# EAGLE board Board v3 (EAGLE 9.7.0)
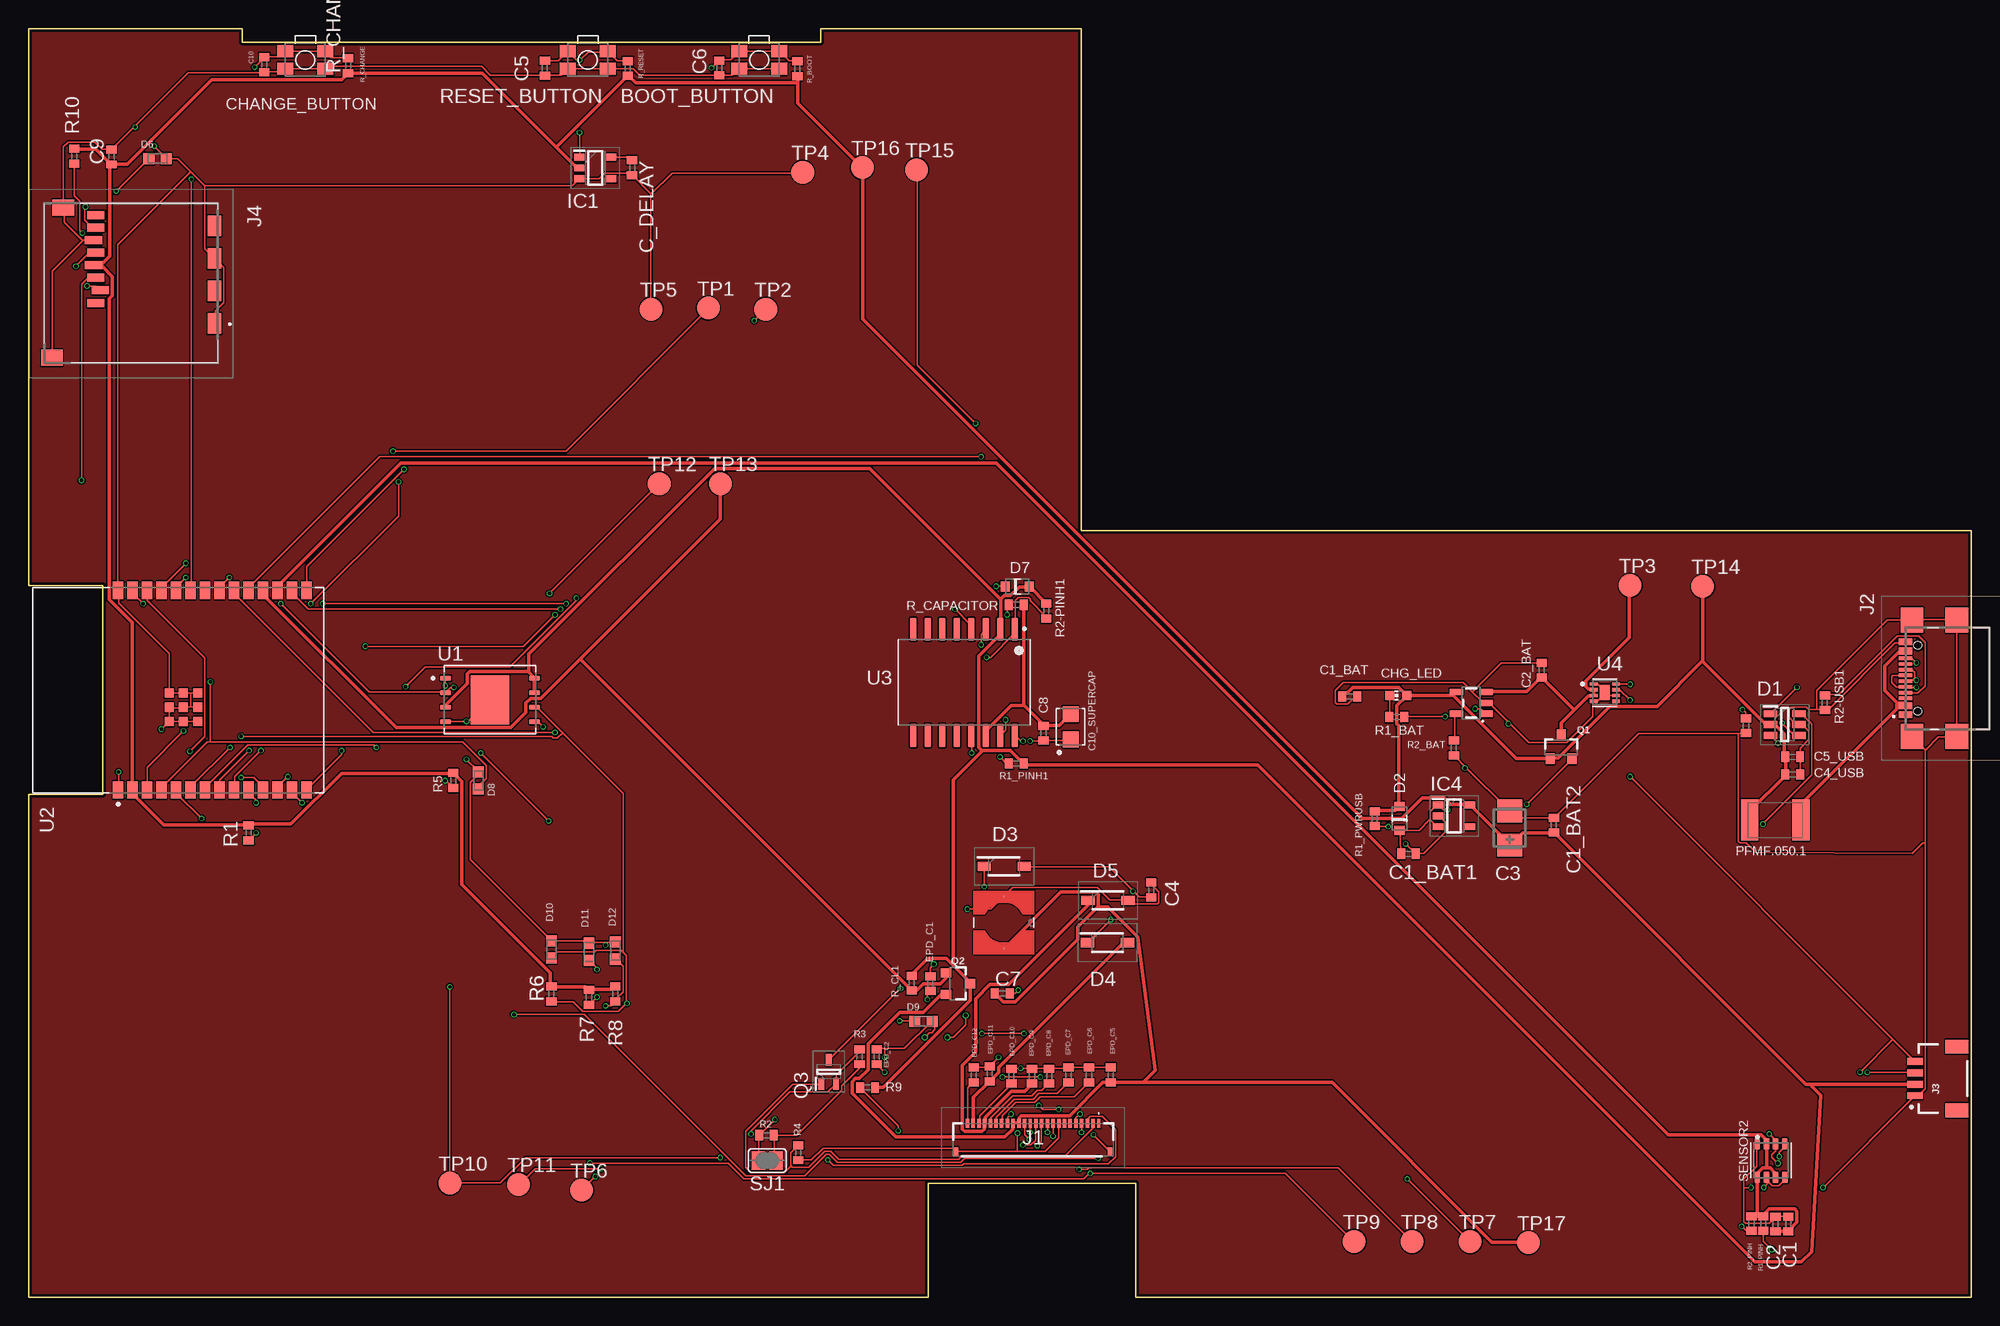
[diagram p0: board, top side]
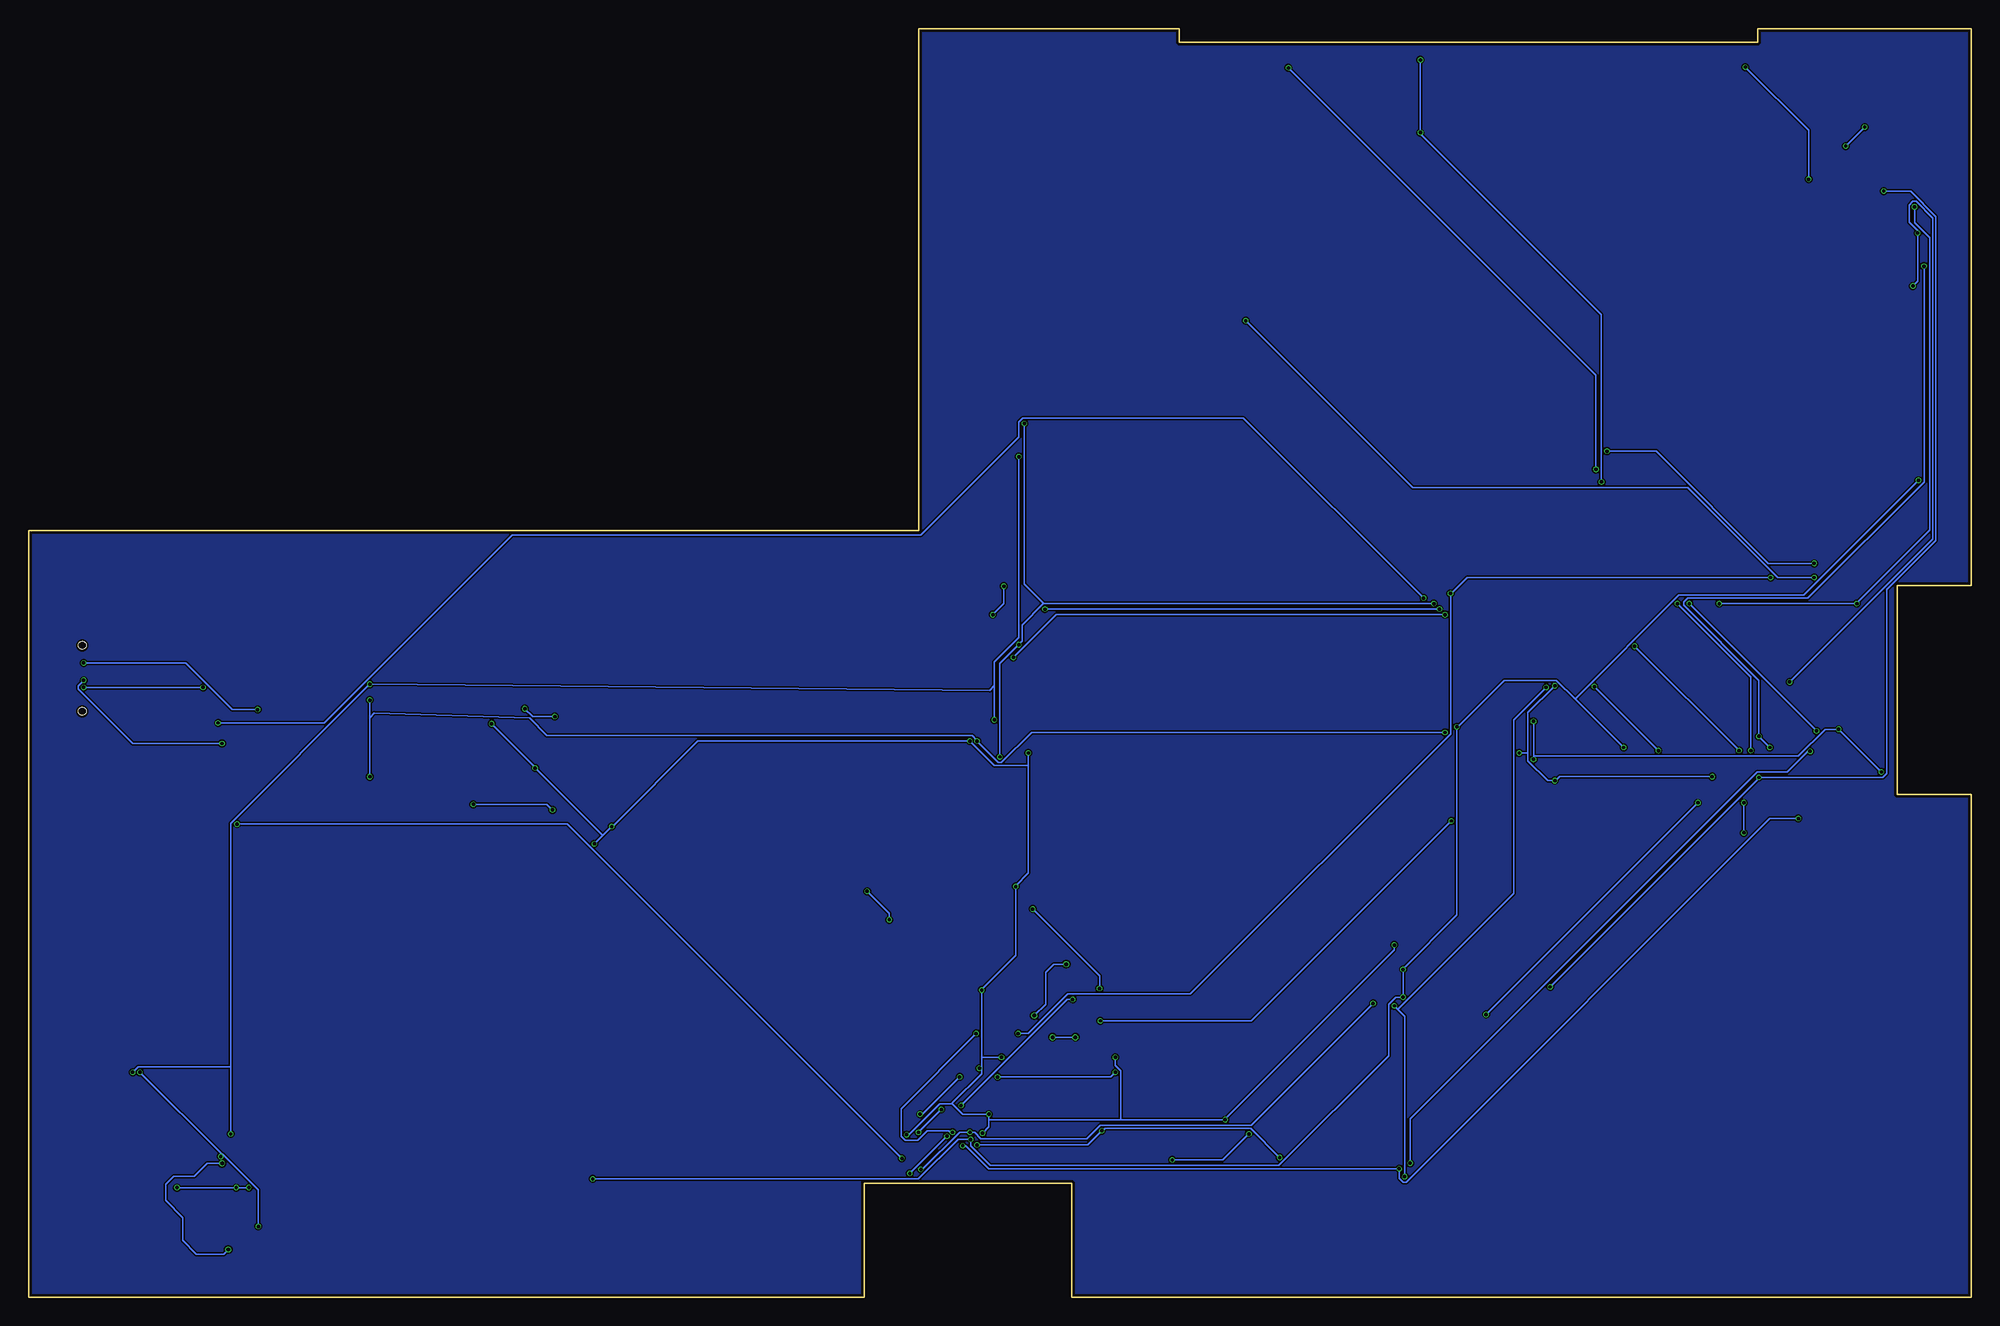
[diagram p1: board, bottom side, seen from below]

Size 170.2 x 111.2 mm. Coordinates in mm from the lower left corner, seen from the top.
Outline: 0,111.2 18.7,111.2 18.7,110 69.4,110 69.4,111.2 92.2,111.2 92.2,67.2 170.2,67.2 170.2,0 97,0 97,10 78.8,10 78.8,0 0,0 0,44.1 6.5,44.1 6.5,62.4 0,62.4 0,111.2
Copper layers (1*16): Top 0.035mm / dielectric 1.6mm / Bottom 0.035mm
Design rules "jlcpcb-2layers": minimum track width 5mil, minimum drill 0.3mm, track to track 5mil, track to pad 5mil, pad to pad 5mil, via to via 5mil, smd to smd 5mil, copper to edge 0.2mm, drill to drill 6mil, minimum pad ring 10mil, minimum via ring 3mil, stop-mask expansion 4mil, vias tented up to drill 0mil, thermal gap 10mil

## Footprints (pad centres in the part's own frame; a part is rotated, then mirrored left to right if it is on the bottom)
MYBUTTON = smd 1.4 x 1.05: 1 1.75,0.75; 2 -1.75,0.75; 3 -1.75,-0.75; 4 1.75,-0.75
EAGLE-LTSPICE_C0402 = smd 0.7 x 0.9: 1 -0.65,0; 2 0.65,0
ESP32_WROVER_EAGLE-LTSPICE_C0402 = smd 0.7 x 0.9: 1 -0.65,0; 2 0.65,0
RCL_CT3528 = smd 2 x 2.2: + -1.5,0; - 1.5,0
CAPCP3225X100N = smd 1.4 x 1.4: 1 -1.1,0; 2 1.1,0
ADAFRUIT_CHIP-LED0603 = smd 0.8 x 0.8: A 0,-0.75; C 0,0.75
SOT95P280X145-6N = smd 1.2 x 0.6: 1 -1.25,0.95; 2 -1.25,0; 3 -1.25,-0.95; 4 1.25,-0.95; 5 1.25,0; 6 1.25,0.95
ESP32_WROVER_AVX---SD0805S020S1R0_AVX_SD0805S020S1R0_0 = smd 0.8 x 0.9: 1 -1.05,0; 2 1.05,0
SOD3716X135N = smd 1.15 x 0.8: 1 -1.75,0; 2 1.75,0
DIOC1608X36N = smd 0.97 x 0.94: 1 -0.75,0; 2 0.75,0
SOT95P280X125-5N = smd 0.9 x 0.6: 1 -1.4,0.95; 2 -1.4,0; 3 -1.4,-0.95; 4 1.4,-0.95; 5 1.4,0.95
SOT95P280X120-5N = smd 0.9 x 0.6: 1 -1.4,0.95; 2 -1.4,0; 3 -1.4,-0.95; 4 1.4,-0.95; 5 1.4,0.95
FH34SRJ24S05SH99 = smd 0.3 x 0.8: 1 5.75,1.45; 2 5.25,1.45; 3 4.75,1.45; 4 4.25,1.45; 5 3.75,1.45; 6 3.25,1.45; 7 2.75,1.45; 8 2.25,1.45; 9 1.75,1.45; 10 1.25,1.45; 11 0.75,1.45; 12 0.25,1.45; 13 -0.25,1.45; 14 -0.75,1.45; 15 -1.25,1.45; 16 -1.75,1.45; 17 -2.25,1.45; 18 -2.75,1.45; 19 -3.25,1.45; 20 -3.75,1.45; 21 -4.25,1.45; 22 -4.75,1.45; 23 -5.25,1.45; 24 -5.75,1.45 | smd 0.4 x 0.8: MP1 6.75,-1.05; MP2 -6.75,-1.05
SAMACSYS_PARTS_USB4110GFA = smd 0.3 x 1.15: A1 -3.35,3.678; A4 -2.55,3.678; A5 -1.25,3.678; A6 -0.25,3.678; A7 0.25,3.678; A8 1.25,3.678; A9 2.55,3.678; A12 3.35,3.678; B1 3.05,3.678; B4 2.25,3.678; B5 1.75,3.678; B6 0.75,3.678; B7 -0.75,3.678; B8 -1.75,3.678; B9 -2.25,3.678; B12 -3.05,3.678 | smd 2.18 x 2: MP1 -5.11,-0.827; MP2 5.11,-0.827; MP3 -5.11,3.103; MP4 5.11,3.103 | hole 0.65: -2.89,2.603; 2.89,2.603
JST04_1MM_RA = smd 0.6 x 1.35: 1 -1.5,0; 2 -0.5,0; 3 0.5,0; 4 1.5,0 | smd 1.2 x 2: NC1 2.8,-3.675; NC2 -2.8,-3.675
112ATAARR03ATTEND = smd 1.8 x 1.2: G1 10.6,10.4; G2 4.9,10.4; S1 7.75,10.4; S2 2.05,10.4 | smd 1.4 x 1.9: G3 13.6,-3.85; G4 0.45,-2.85 | smd 0.7 x 1.5: P1 8.8,0; P2 7.7,0.4; P3 6.6,0; P4 5.5,-0.2; P5 4.4,0; P6 3.3,-0.2; P7 2.2,0; P8 1.1,0
IND_4828-WE-TPC_WRE = smd 0.127 x 0.127: 1 -2.286,0; 2 2.286,0
ESP32_WROVER_SPARKFUN-IC-POWER_SOT23-5 = smd 0.55 x 1.2: 1 -0.95,-1.3; 2 0,-1.3; 3 0.95,-1.3; 4 0.95,1.3; 5 -0.95,1.3
ESP32C6_VARISTOR_CT/CN1812 = smd 1.5 x 3.6: 1 -2.25,0; 2 2.25,0
ESP32_WROVER_SPARKFUN-DISCRETESEMI_SOT23-3 = smd 0.8 x 0.9: 1 -0.95,-1; 2 0.95,-1; 3 0,1.1
SOT65P210X110-3N = smd 1.05 x 0.5: 1 -1.05,0.65; 2 -1.05,-0.65; 3 1.05,0
ESP32_WROVER_EAGLE-LTSPICE_R0402 = smd 0.7 x 0.9: 1 -0.65,0; 2 0.65,0
ESP32_WROVER_BME680_PSON80P300X300X100-8N = smd 1.016 x 0.5: 1 1.458,1.2; 2 1.458,0.4; 3 1.458,-0.4; 4 1.458,-1.2; 5 -1.458,-1.22; 6 -1.458,-0.4; 7 -1.458,0.4; 8 -1.458,1.2
SJ = smd 1.168 x 1.6: 1 -0.762,0; 2 0.762,0
TP20R = smd 2 x 2: TP 0,0
SON127P600X800X80-9N = smd 0.94 x 0.44: 1 -3.895,1.905; 2 -3.895,0.635; 3 -3.895,-0.635; 4 -3.895,-1.905; 5 3.895,-1.905; 6 3.895,-0.635; 7 3.895,0.635; 8 3.895,1.905 | smd 3.4 x 4.3: 9 0,0
XCVR_ESP32-C6-WROOM-1-N8 = smd 1.5 x 0.9: 1 -8.75,5.26; 2 -8.75,3.99; 3 -8.75,2.72; 4 -8.75,1.45; 5 -8.75,0.18; 6 -8.75,-1.09; 7 -8.75,-2.36; 8 -8.75,-3.63; 9 -8.75,-4.9; 10 -8.75,-6.17; 11 -8.75,-7.44; 12 -8.75,-8.71; 13 -8.75,-9.98; 14 -8.75,-11.25; 15 8.75,-11.25; 16 8.75,-9.98; 17 8.75,-8.71; 18 8.75,-7.44; 19 8.75,-6.17; 20 8.75,-4.9; 21 8.75,-3.63; 22 8.75,-2.36; 23 8.75,-1.09; 24 8.75,0.18; 25 8.75,1.45; 26 8.75,2.72; 27 8.75,3.99; 28 8.75,5.26 | smd 0.8 x 0.8: 29_1 -2.755,0.79; 29_2 -1.505,0.79; 29_3 -0.255,0.79; 29_4 -2.755,-0.46; 29_5 -1.505,-0.46; 29_6 -0.255,-0.46; 29_7 -2.755,-1.71; 29_8 -1.505,-1.71; 29_9 -0.255,-1.71
SOIC127P1032X265-16N = smd 2.05 x 0.59: 1 -4.655,4.445; 2 -4.655,3.175; 3 -4.655,1.905; 4 -4.655,0.635; 5 -4.655,-0.635; 6 -4.655,-1.905; 7 -4.655,-3.175; 8 -4.655,-4.445; 9 4.655,-4.445; 10 4.655,-3.175; 11 4.655,-1.905; 12 4.655,-0.635; 13 4.655,0.635; 14 4.655,1.905; 15 4.655,3.175; 16 4.655,4.445
SON50P200X200X80-9N = smd 0.76 x 0.27: 1 -0.985,0.75; 2 -0.985,0.25; 3 -0.985,-0.25; 4 -0.985,-0.75; 5 0.985,-0.75; 6 0.985,-0.25; 7 0.985,0.25; 8 0.985,0.75 | smd 0.9 x 1.3: 9 0,0

## Placement (x,y rotation side)
BOOT_BUTTON  BUTTON_CUSYOMV1  [MYBUTTON]  64,108.45 180 top
C1  100nF  [EAGLE-LTSPICE_C0402]  154.15,6.44 90 top
C1_BAT  4.7uF  [EAGLE-LTSPICE_C0402]  115.74,52.66 0 top
C1_BAT1  4.7uF  [ESP32_WROVER_EAGLE-LTSPICE_C0402]  120.88,38.88 0 top
C1_BAT2  4.7uF  [ESP32_WROVER_EAGLE-LTSPICE_C0402]  133.62,41.38 90 top
C2  100nF  [EAGLE-LTSPICE_C0402]  153.03,6.44 90 top
C2_BAT  4.7uF  [EAGLE-LTSPICE_C0402]  132.55,54.96 90 top
C3  100uF TANT  [RCL_CT3528]  129.75,41.14 90 top
C4  4.7uF/25V  [ESP32_WROVER_EAGLE-LTSPICE_C0402]  98.35,35.7 90 top
C4_USB  100nF  [ESP32_WROVER_EAGLE-LTSPICE_C0402]  154.54,45.84 0 top
C5  1uF  [EAGLE-LTSPICE_C0402]  45.23,107.72 270 top
C5_USB  4.7uF  [ESP32_WROVER_EAGLE-LTSPICE_C0402]  154.53,47.38 0 top
C6  100nF  [EAGLE-LTSPICE_C0402]  60.51,107.74 270 top
C7  10uF  [ESP32_WROVER_EAGLE-LTSPICE_C0402]  85.3,26.64 0 top
C8  100nF  [EAGLE-LTSPICE_C0402]  88.91,49.44 270 top
C9  100nF  [EAGLE-LTSPICE_C0402]  7.27,99.94 90 top
C10  100nF  [EAGLE-LTSPICE_C0402]  20.65,108.04 270 top
C10_SUPERCAP  CPH3225A  [CAPCP3225X100N]  91.29,50.01 90 top
C_DELAY  100nF  [EAGLE-LTSPICE_C0402]  52.87,99 270 top
CHANGE_BUTTON  BUTTON_CUSYOMV1  [MYBUTTON]  24.25,108.45 180 top
CHG_LED  [ADAFRUIT_CHIP-LED0603]  119.98,52.75 90 top
D1  USBLC6-2SC6Y  [SOT95P280X145-6N]  153.84,50.21 0 top
D2  ESP32_WROVER_AVX---SD0805S020S1R0_AVX_SD0805S020S1R0_0_0AVX_SD0805S020S1R0_0_0  [ESP32_WROVER_AVX---SD0805S020S1R0_AVX_SD0805S020S1R0_0]  120.09,41.99 90 top
D3  MBR0530  [SOD3716X135N]  85.46,37.78 0 top
D4  MBR0530  [SOD3716X135N]  94.52,31.09 0 top
D5  MBR0530  [SOD3716X135N]  94.56,34.79 0 top
D6  PGB1010603MR  [DIOC1608X36N]  11.3,99.8 0 top
D7  ESP32_WROVER_AVX---SD0805S020S1R0_AVX_SD0805S020S1R0_0_0AVX_SD0805S020S1R0_0_0  [ESP32_WROVER_AVX---SD0805S020S1R0_AVX_SD0805S020S1R0_0]  86.61,62.3 0 top
D8  PGB1010603MR  [DIOC1608X36N]  39.4,45.3 90 top
D9  PGB1010603MR  [DIOC1608X36N]  78.4,24.2 0 top
D10  PGB1010603MR  [DIOC1608X36N]  45.8,30.5 90 top
D11  PGB1010603MR  [DIOC1608X36N]  49.1,30.3 90 top
D12  PGB1010603MR  [DIOC1608X36N]  51.4,30.4 90 top
EPD_C1  1uF/50V  [ESP32_WROVER_EAGLE-LTSPICE_C0402]  79,27.5 90 top
EPD_C2  1uF/50V  [ESP32_WROVER_EAGLE-LTSPICE_C0402]  74.3,21.1 90 top
EPD_C5  0.1uF/50V  [ESP32_WROVER_EAGLE-LTSPICE_C0402]  94.8,19.5 90 top
EPD_C6  1uF/50V  [ESP32_WROVER_EAGLE-LTSPICE_C0402]  92.9,19.5 90 top
EPD_C7  1uF/50V  [ESP32_WROVER_EAGLE-LTSPICE_C0402]  91.1,19.5 90 top
EPD_C8  1uF/50V  [ESP32_WROVER_EAGLE-LTSPICE_C0402]  89.4,19.4 90 top
EPD_C9  1uF/50V  [ESP32_WROVER_EAGLE-LTSPICE_C0402]  87.9,19.4 90 top
EPD_C10  1uF/50V  [ESP32_WROVER_EAGLE-LTSPICE_C0402]  86.1,19.4 90 top
EPD_C11  1uF/50V  [ESP32_WROVER_EAGLE-LTSPICE_C0402]  84.2,19.6 90 top
EPD_C12  1uF/50V  [ESP32_WROVER_EAGLE-LTSPICE_C0402]  82.8,19.5 90 top
IC1  BD5229G-TR  [SOT95P280X125-5N]  49.65,98.98 0 top
IC4  XC6220A331MR-G  [SOT95P280X120-5N]  124.88,42.2 0 top
J1  FH34SRJ-24S-0.5SH_99_  [FH34SRJ24S05SH99]  88,13.8 0 top
J2  SAMACSYS_PARTS_USB4110-GF-A  [SAMACSYS_PARTS_USB4110GFA]  168.1,54.26 90 top
J3  QWIIC_RIGHT_ANGLE  [JST04_1MM_RA]  165.25,19.19 90 top
J4  112A-TAAR-R03_ATTEND  [112ATAARR03ATTEND]  5.89,95.96 270 top
L1  744043680IND_4828-WE-TPC_WRE  [IND_4828-WE-TPC_WRE]  85.43,32.85 270 top
MCP73831  ESP32_WROVER_SPARKFUN-IC-POWER_MCP73831  [ESP32_WROVER_SPARKFUN-IC-POWER_SOT23-5]  126.38,52.1 90 top
PFMF.050.1  ESP32C6_VARISTORCN1812  [ESP32C6_VARISTOR_CT/CN1812]  153.01,41.84 180 top
Q1  20V/4.2A/52mΩ/1.4W  [ESP32_WROVER_SPARKFUN-DISCRETESEMI_SOT23-3]  134.26,48.21 0 top
Q2  20V/4.2A/52mΩ/1.4W  [ESP32_WROVER_SPARKFUN-DISCRETESEMI_SOT23-3]  81.38,27.51 270 top
Q3  SI1308EDL-T1-GE3  [SOT65P210X110-3N]  70.09,19.79 90 top
R1  10K  [ESP32_WROVER_EAGLE-LTSPICE_R0402]  19.28,40.72 90 top
R1_BAT  200  [ESP32_WROVER_EAGLE-LTSPICE_R0402]  119.86,50.86 0 top
R1_PINH  10K  [ESP32_WROVER_EAGLE-LTSPICE_R0402]  151.96,6.48 90 top
R1_PINH1  10K  [ESP32_WROVER_EAGLE-LTSPICE_R0402]  86.52,46.79 0 top
R1_PWRUSB  100K  [ESP32_WROVER_EAGLE-LTSPICE_R0402]  117.92,41.95 270 top
R2  2.2  [ESP32_WROVER_EAGLE-LTSPICE_R0402]  64.65,14.22 0 top
R2-PINH1  10K  [ESP32_WROVER_EAGLE-LTSPICE_R0402]  89.15,60.16 90 top
R2-USB  5k1  [ESP32_WROVER_EAGLE-LTSPICE_R0402]  150.45,50.1 270 top
R2-USB1  5k1  [ESP32_WROVER_EAGLE-LTSPICE_R0402]  157.36,52.12 90 top
R2_BAT  2K  [ESP32_WROVER_EAGLE-LTSPICE_R0402]  124.86,48.15 90 top
R2_PINH  10K  [ESP32_WROVER_EAGLE-LTSPICE_R0402]  150.93,6.48 90 top
R3  0.47  [ESP32_WROVER_EAGLE-LTSPICE_R0402]  72.79,21.1 90 top
R4  10K  [ESP32_WROVER_EAGLE-LTSPICE_R0402]  67.43,12.69 90 top
R5  10K  [ESP32_WROVER_EAGLE-LTSPICE_R0402]  37.2,45.3 90 top
R6  10K  [ESP32_WROVER_EAGLE-LTSPICE_R0402]  45.8,26.6 90 top
R7  10K  [ESP32_WROVER_EAGLE-LTSPICE_R0402]  49.1,26.3 90 top
R8  10K  [ESP32_WROVER_EAGLE-LTSPICE_R0402]  51.4,26.6 90 top
R9  10K  [ESP32_WROVER_EAGLE-LTSPICE_R0402]  73.5,18.4 0 top
R10  10K  [ESP32_WROVER_EAGLE-LTSPICE_R0402]  4,100 90 top
R_BOOT  10k  [ESP32_WROVER_EAGLE-LTSPICE_R0402]  67.35,107.68 90 top
R_CAPACITOR  15  [ESP32_WROVER_EAGLE-LTSPICE_R0402]  86.52,60.7 0 top
R_CHANGE  10k  [ESP32_WROVER_EAGLE-LTSPICE_R0402]  27.99,107.95 90 top
R_CL1  10K  [ESP32_WROVER_EAGLE-LTSPICE_R0402]  77.37,27.54 90 top
R_RESET  10k  [ESP32_WROVER_EAGLE-LTSPICE_R0402]  52.49,107.7 90 top
RESET_BUTTON  BUTTON_CUSYOMV1  [MYBUTTON]  48.99,108.45 180 top
SENSOR2  ESP32_WROVER_BME680_BME680  [ESP32_WROVER_BME680_PSON80P300X300X100-8N]  152.64,12 90 top
SJ1  [SJ]  64.71,12 0 top
TP1  TPTP20R  [TP20R]  59.56,86.7 0 top
TP2  TPTP20R  [TP20R]  64.58,86.6 0 top
TP3  TPTP20R  [TP20R]  140.3,62.4 0 top
TP4  TPTP20R  [TP20R]  67.82,98.6 0 top
TP5  TPTP20R  [TP20R]  54.54,86.6 0 top
TP6  TPTP20R  [TP20R]  48.46,9.4 0 top
TP7  TPTP20R  [TP20R]  126.28,4.9 0 top
TP8  TPTP20R  [TP20R]  121.2,4.9 0 top
TP9  TPTP20R  [TP20R]  116.12,4.9 0 top
TP10  TPTP20R  [TP20R]  36.9,10.02 0 top
TP11  TPTP20R  [TP20R]  42.94,9.9 0 top
TP12  TPTP20R  [TP20R]  55.25,71.32 0 top
TP13  TPTP20R  [TP20R]  60.6,71.32 0 top
TP14  TPTP20R  [TP20R]  146.65,62.32 0 top
TP15  TPTP20R  [TP20R]  77.8,98.82 0 top
TP16  TPTP20R  [TP20R]  73.05,99.02 0 top
TP17  TPTP20R  [TP20R]  131.39,4.8 0 top
U1  W25Q512JVEIQ  [SON127P600X800X80-9N]  40.43,52.36 0 top
U2  ESP32-C6-WROOM-1-N8  [XCVR_ESP32-C6-WROOM-1-N8]  13.11,53.22 90 top
U3  DS3231SN#  [SOIC127P1032X265-16N]  81.96,53.91 270 top
U4  MAX17048G+T10  [SON50P200X200X80-9N]  138.08,53.01 0 top

## Library data of the parts
BOOT_BUTTON CHANGE_BUTTON CHG_LED PFMF.050.1 RESET_BUTTON SJ1 TP1-TP17 = DeskAssistant v19 v1
C1 C1_BAT C1_BAT1 C1_BAT2 C2 C2_BAT C4 C4_USB C5 C5_USB C6-C10 C_DELAY EPD_C1 EPD_C2 EPD_C5-EPD_C12 = DeskAssistant v19 v1; SPICEMODEL: NONE; SPICEPREFIX: C
C3 = DeskAssistant v19 v1; SPICEPREFIX: C
C10_SUPERCAP = DeskAssistant v19 v1; AVAILABILITY: Not in stock; CHECK_PRICES: https://www.snapeda.com/parts/CPH3225A/Seiko+Instruments/view-part/?ref=eda; DESCRIPTION: 11 mF (EDLC) Supercapacitor 3.3 V 1210 (3225 Metric) - -; MF: Seiko Instruments; MP: CPH3225A; PACKAGE: 1210 Seiko; PRICE: None; PURCHASE-URL: https://www.snapeda.com/api/url_track_click_mouser/?unipart_id=562593&manufacturer=Seiko Instruments&part_name=CPH3225A&search_term=None; SNAPEDA_LINK: https://www.snapeda.com/parts/CPH3225A/Seiko+Instruments/view-part/?ref=snap
D1 = DeskAssistant v19 v1; AVAILABILITY: In Stock; CHECK_PRICES: https://www.snapeda.com/parts/USBLC6-2SC6Y/STMicroelectronics/view-part/?ref=eda; DESCRIPTION: 17V Clamp 5A (8/20µs) Ipp Tvs Diode Surface Mount SOT-23-6; MF: STMicroelectronics; MP: USBLC6-2SC6Y; PACKAGE: SOT-23-6 STMicroelectronics; PRICE: None; SNAPEDA_LINK: https://www.snapeda.com/parts/USBLC6-2SC6Y/STMicroelectronics/view-part/?ref=snap
D2 D7 = DeskAssistant v19 v1; CENTROID_NOT_SPECIFIED: No; DATASHEET: http://datasheets.avx.com/schottky.pdf; DIGIKEY_DESCRIPTION: DIODE SCHOTTKY 20V 1A 0805; DIGIKEY_PART_NUMBER: 478-7800-1-ND; LEAD_FREE: yes; MF: AVX; MOUSER_PART_NUMBER: 581-SD0805S020S1R0; PACKAGE: 0805 (2012 metric); PREFIX: D; ROHS: yes; TEMPERATURE_RANGE_HIGH: +125°C; TEMPERATURE_RANGE_LOW: -55°C
D3-D5 = DeskAssistant v19 v1; AVAILABILITY: In Stock; CHECK_PRICES: https://www.snapeda.com/parts/MBR0530/Onsemi/view-part/?ref=eda; DESCRIPTION: Diode Schottky 30 V 500mA Surface Mount SOD-123; MF: ON Semiconductor; MP: MBR0530; PACKAGE: SOD-123-2 ON Semiconductor; PRICE: None; PURCHASE-URL: https://www.snapeda.com/api/url_track_click_mouser/?unipart_id=179458&manufacturer=ON Semiconductor&part_name=MBR0530&search_term=None; SNAPEDA_LINK: https://www.snapeda.com/parts/MBR0530/Onsemi/view-part/?ref=snap
D6 D8-D12 = DeskAssistant v19 v1; AVAILABILITY: In Stock; CHECK_PRICES: https://www.snapeda.com/parts/PGB1010603MR/Littelfuse/view-part/?ref=eda; DESCRIPTION: 150V (Typ) Clamp - Ipp Tvs Diode Surface Mount 0603 (1608 Metric); MF: Littelfuse Inc.; MP: PGB1010603MR; PACKAGE: 0603 Littelfuse Inc.; PRICE: None; PURCHASE-URL: https://www.snapeda.com/api/url_track_click_mouser/?unipart_id=5659453&manufacturer=Littelfuse Inc.&part_name=PGB1010603MR&search_term=None; SNAPEDA_LINK: https://www.snapeda.com/parts/PGB1010603MR/Littelfuse/view-part/?ref=snap
IC1 = DeskAssistant v19 v1; DESCRIPTION: Voltage Detector with Adjustable Delay Time: CMOS processes are utilized to develop high precision, low current consumption CMOS reset ICs that allow arbitrary setting of the delay time. The extensive lineup includes both Nch Open Drain and CMOS output types in a wide range of detection voltages (from 2.3V to 6.0V, in 0.1V steps), enabling selection of the ideal solution based on customer requirements. In addition, the entire series is of course both lead-free and RoHS-compliant.; HEIGHT: 1.25mm; MANUFACTURER_NAME: ROHM Semiconductor; MANUFACTURER_PART_NUMBER: BD5229G-TR; MOUSER_PART_NUMBER: 755-BD5229G-TR; MOUSER_PRICE-STOCK: https://www.mouser.co.uk/ProductDetail/ROHM-Semiconductor/BD5229G-TR?qs=4kLU8WoGk0vvnhrrYwdszw%3D%3D
IC4 = DeskAssistant v19 v1; DESCRIPTION: LDO Voltage Regulators; HEIGHT: 1.2mm; MANUFACTURER_NAME: Torex; MANUFACTURER_PART_NUMBER: XC6220A331MR-G; MOUSER_PART_NUMBER: 865-XC6220A331MR-G; MOUSER_PRICE-STOCK: https://www.mouser.co.uk/ProductDetail/Torex-Semiconductor/XC6220A331MR-G?qs=AsjdqWjXhJ8ZSWznL1J0gg%3D%3D
J1 = DeskAssistant v19 v1; DESCRIPTION: 24 Position FFC, FPC Connector Contacts, Top and Bottom 0.020" (0.50mm) Surface Mount, Right Angle; HEIGHT: 1.1mm; MANUFACTURER_NAME: Hirose; MANUFACTURER_PART_NUMBER: FH34SRJ-24S-0.5SH(99); MOUSER_PART_NUMBER: 798-FH34SRJ24S05SH99; MOUSER_PRICE-STOCK: https://www.mouser.co.uk/ProductDetail/Hirose-Connector/FH34SRJ-24S-0.5SH99?qs=vcbW%252B4%252BSTIpKBl5ap9J8Fw%3D%3D
J2 = DeskAssistant v19 v1; DESCRIPTION: CONN USB 2.0 TYPE-C R/A SMT; HEIGHT: 3.26mm; MANUFACTURER_NAME: GCT (GLOBAL CONNECTOR TECHNOLOGY); MANUFACTURER_PART_NUMBER: USB4110-GF-A; MOUSER_PART_NUMBER: 640-USB4110-GF-A; MOUSER_PRICE-STOCK: https://www.mouser.co.uk/ProductDetail/GCT/USB4110-GF-A?qs=KUoIvG%2F9IlYiZvIXQjyJeA%3D%3D
J3 = DeskAssistant v19 v1; PROD_ID: CONN-13694
J4 = DeskAssistant v19 v1; DESCRIPTION: Micro SD Card Socket, Push-Push Type, Top Mount, SMT, H=1.83mm, 10u; HEIGHT: 1.9mm; MANUFACTURER_NAME: ATTEND; MANUFACTURER_PART_NUMBER: 112A-TAAR-R03 ATTEND
L1 = DeskAssistant v19 v1; 68UH: 68uH; COPYRIGHT: Copyright (C) 2024 Ultra Librarian. All rights reserved.; MANUFACTURER_PART_NUMBER: 744043680; MFR_NAME: Wurth Electronics
MCP73831 = DeskAssistant v19 v1; PROD_ID: IC-09995
Q1 Q2 = DeskAssistant v19 v1; PROD_ID: TRAN-14388
Q3 = DeskAssistant v19 v1; AVAILABILITY: In Stock; CHECK_PRICES: https://www.snapeda.com/parts/SI1308EDL-T1-GE3/Vishay+Siliconix/view-part/?ref=eda; DESCRIPTION: Si1308EDL-T1-GE3 N-channel MOSFET Transistor, 1.5 A, 30 V, 3-Pin SC-70 | Siliconix / Vishay SI1308EDL-T1-GE3; MF: Vishay Siliconix; MP: SI1308EDL-T1-GE3; PACKAGE: SOT-323 Vishay Semiconductor; PRICE: None; PURCHASE-URL: https://www.snapeda.com/api/url_track_click_mouser/?unipart_id=274603&manufacturer=Vishay Siliconix&part_name=SI1308EDL-T1-GE3&search_term=None; SNAPEDA_LINK: https://www.snapeda.com/parts/SI1308EDL-T1-GE3/Vishay+Siliconix/view-part/?ref=snap
R1 R1_BAT R1_PINH R1_PINH1 R1_PWRUSB R2 R2-PINH1 R2-USB R2-USB1 R2_BAT R2_PINH R3-R10 R_BOOT R_CAPACITOR R_CHANGE R_CL1 R_RESET = DeskAssistant v19 v1; SPICEMODEL: NONE; SPICEPREFIX: R
SENSOR2 = DeskAssistant v19 v1; AVAILABILITY: Unavailable; DESCRIPTION: Integrated Environmental Unit; MF: Bosch Sensortec; MP: BME680; PACKAGE: LGA-8 Bosch Tools; PRICE: None
U1 = DeskAssistant v19 v1; AVAILABILITY: In Stock; CHECK_PRICES: https://www.snapeda.com/parts/W25Q512JVEIQ/Winbond+Electronics/view-part/?ref=eda; DESCRIPTION: FLASH - NOR Memory IC 512Mb (64M x 8) SPI - Quad I/O 133 MHz 8-WSON (8x6); MF: Winbond Electronics; MP: W25Q512JVEIQ; PACKAGE: Package; PRICE: None; SNAPEDA_LINK: https://www.snapeda.com/parts/W25Q512JVEIQ/Winbond+Electronics/view-part/?ref=snap
U2 = DeskAssistant v19 v1; AVAILABILITY: In Stock; CHECK_PRICES: https://www.snapeda.com/parts/ESP32-C6-WROOM-1-N8/Espressif+Systems/view-part/?ref=eda; DESCRIPTION: Multiprotocol Modules ESP32-C6 module, Wi-Fi 6 in 2.4 GHz band, Bluetooth 5, Zigbee 3.0 and Thread. ESP34-WROOM Compatible - ENGINEERING SAMPLE; MF: Espressif Systems; MP: ESP32-C6-WROOM-1-N8; PACKAGE: None; PRICE: None; SNAPEDA_LINK: https://www.snapeda.com/parts/ESP32-C6-WROOM-1-N8/Espressif+Systems/view-part/?ref=snap
U3 = DeskAssistant v19 v1; AVAILABILITY: In Stock; CHECK_PRICES: https://www.snapeda.com/parts/DS3231SN%23/Analog+Devices/view-part/?ref=eda; DESCRIPTION: Extremely Accurate I²C-Integrated RTC/TCXO/Crystal; MF: Analog Devices; MP: DS3231SN#; PACKAGE: SOIC-16 Maxim; PRICE: None; PURCHASE-URL: https://www.snapeda.com/api/url_track_click_mouser/?unipart_id=99048&manufacturer=Analog Devices&part_name=DS3231SN#&search_term=None; SNAPEDA_LINK: https://www.snapeda.com/parts/DS3231SN%23/Analog+Devices/view-part/?ref=snap
U4 = DeskAssistant v19 v1; AVAILABILITY: In Stock; CHECK_PRICES: https://www.snapeda.com/parts/MAX17048G+T10/Analog+Devices/view-part/?ref=eda; DESCRIPTION: 3µA 1-Cell/2-Cell Fuel Gauge with ModelGauge; MF: Analog Devices; MP: MAX17048G+T10; PACKAGE: TDFN-8 Maxim; PRICE: None; PURCHASE-URL: https://www.snapeda.com/api/url_track_click_mouser/?unipart_id=329239&manufacturer=Analog Devices&part_name=MAX17048G+T10&search_term=None; SNAPEDA_LINK: https://www.snapeda.com/parts/MAX17048G+T10/Analog+Devices/view-part/?ref=snap

## Nets
3V3: C1_BAT2.1 C3.+ C9.1 D7.2 IC1.2 IC4.5 J3.2 J4.P4 Q2.3 R1.2 R1_PINH1.2 R2-PINH1.2 R5.2 R6.2 R7.2 R8.2 R9.2 R10.2 R_BOOT.1 R_CHANGE.1 R_CL1.2 R_RESET.1 TP16.TP U1.3 U1.7 U1.8 U2.2 U3.2
32KHZ: R2-PINH1.1 U2.9 U3.1
DN: D1.1 J2.A7 J2.B7
DP: D1.3 J2.A6 J2.B6
EPD_3V3: C7.1 EPD_C5.1 J1.15 J1.16 L1.2 Q2.2 TP17.TP
EPD_3V3_C: Q2.1 R_CL1.1 TP13.TP U2.18
EPD_BUSY: J1.9 TP9.TP U2.26
EPD_CS: D6.1 J1.12 R9.1 TP10.TP U2.11
EPD_DC: J1.11 TP11.TP U2.5
EPD_RST: J1.10 TP12.TP U2.21
FLASH_CS: D9.1 R5.1 U1.1 U2.12
GDR: J1.2 Q3.1 R4.2
GND: BOOT_BUTTON.1 BOOT_BUTTON.2 C1.2 C1_BAT1.2 C1_BAT2.2 C1_BAT.2 C2.2 C2_BAT.2 C3.- C4_USB.2 C5.2 C5_USB.2 C6.2 C7.2 C8.2 C9.2 C10.2 C10_SUPERCAP.1 C_DELAY.2 CHANGE_BUTTON.1 CHANGE_BUTTON.2 D1.5 D3.1 D6.2 D8.2 D9.2 D10.2 D11.2 D12.2 EPD_C1.2 EPD_C2.2 EPD_C5.2 EPD_C6.2 EPD_C7.2 EPD_C8.2 EPD_C9.2 EPD_C10.2 EPD_C11.2 EPD_C12.2 IC1.3 IC4.2 J1.8 J1.17 J1.MP1 J1.MP2 J2.A1 J2.A12 J2.B1 J2.B12 J2.MP1 J2.MP2 J2.MP3 J2.MP4 J3.1 J4.G1 J4.G2 J4.G3 J4.G4 J4.P6 MCP73831.2 R1_PWRUSB.2 R2-USB1.1 R2-USB.2 R2.1 R2_BAT.1 R4.1 RESET_BUTTON.1 RESET_BUTTON.2 SENSOR2.1 SENSOR2.5 SENSOR2.7 SJ1.1 TP4.TP TP5.TP U1.4 U1.9 U2.1 U2.28 U2.29_1 U2.29_2 U2.29_3 U2.29_4 U2.29_5 U2.29_6 U2.29_7 U2.29_8 U2.29_9 U3.13 U4.1 U4.4 U4.6 U4.9
GPIO8: R1.1 U2.10
I2C_PW: C1.1 C2.1 R1_PINH.2 R2_PINH.2 SENSOR2.2 SENSOR2.6 SENSOR2.8 U2.17
INT_RTC: R1_PINH1.1 TP15.TP U2.8 U3.3
IO/BOOT: BOOT_BUTTON.3 BOOT_BUTTON.4 C6.1 R_BOOT.2 U2.15
IO/CHANGE: C10.1 CHANGE_BUTTON.3 CHANGE_BUTTON.4 R_CHANGE.2 U2.23
MISO: D12.1 J4.P7 R8.1 TP6.TP U1.2 U2.27
MOSI: D11.1 J1.14 J4.P3 R7.1 TP7.TP U1.5 U2.7
N$1: J2.A5 R2-USB1.2
N$2: J2.B5 R2-USB.1
N$3: C1_BAT1.1 D2.1 IC4.1 IC4.3 Q1.2
N$4: CHG_LED.C R1_BAT.1
N$5: MCP73831.1 R1_BAT.2
N$6: C4.1 D3.2 D4.1
N$7: MCP73831.5 R2_BAT.2
N$8: C_DELAY.1 IC1.5
N$9: D7.1 R_CAPACITOR.1
N$10: EPD_C12.1 J1.24
N$11: EPD_C6.1 J1.18
N$12: EPD_C7.1 J1.19
N$13: EPD_C8.1 J1.20
N$14: EPD_C10.1 J1.22
N$18: EPD_C2.1 J1.5
N$19: EPD_C1.1 J1.4
PREVGH: D5.1 EPD_C9.1 J1.21
PREVGL: D4.2 EPD_C11.1 J1.23
RESE: J1.3 Q3.2 R3.2
RESE': R2.2 R3.1 SJ1.2
RESET: C5.1 IC1.1 R_RESET.2 RESET_BUTTON.3 RESET_BUTTON.4 U2.3
RTC_RST: U2.16 U3.4
RX: TP2.TP U2.24
SCK: D10.1 J1.13 J4.P5 R6.1 TP8.TP U1.6 U2.6
SCL: J3.4 R2_PINH.1 SENSOR2.4 U2.20 U3.16 U4.7
SDA: J3.3 R1_PINH.1 SENSOR2.3 U2.19 U3.15 U4.8
SRC: C4.2 D5.2 L1.1 Q3.3
SS_SD: D8.1 J4.P2 R10.1 U2.4
TX: TP1.TP U2.25
USB_D+: D1.4 U2.14
USB_D-: D1.6 U2.13
VBAT: C2_BAT.1 MCP73831.3 Q1.3 TP3.TP U4.2 U4.3
VBUS: C1_BAT.1 C4_USB.1 C5_USB.1 CHG_LED.A D1.2 D2.2 MCP73831.4 PFMF.050.1.2 Q1.1 R1_PWRUSB.1 TP14.TP
VRTC: C8.1 C10_SUPERCAP.2 R_CAPACITOR.2 U3.14
VUSB: J2.A4 J2.A9 J2.B4 J2.B9 PFMF.050.1.1

## Tracks (layer width: path | path; a pad name or v marks a point on that pad's centre or on a via)
3V3
  Top 0.3: R9.2 74.17,18.42 74.87,18.42 82.48,26.03 82.48,27.49 Q2.3 82.48,27.63 80.95,29.15 | R_CL1.2 77.37,28.32 78.78,29.73 80.38,29.73 80.95,29.15 | 43.77,54.85 38.64,54.85 38.43,54.64 38.43,53.81 36.56,51.94 36.56,51.73 U1.3 | 43.77,54.85 44.32,54.29 U1.8 44.32,54.15 44.32,53.05 U1.7 | R2-PINH1.2 89.12,60.87 87.67,62.33 D7.2 87.53,62.26 86.77,62.26 86.01,61.49 85.45,61.49 85.18,61.22 | 83.52,47.92 86.01,47.92 87.12,46.81 R1_PINH1.2 87.25,46.67 107.66,46.67 151.21,3.12 155.3,3.12 156.21,4.03 157,17.7 156.2,18.5 156.21,18.5 156.21,18.7 | 83.52,47.92 83.24,48.2 83.24,56.23 85.11,58.1 85.11,58.52 U3.2 85.18,58.66 85.18,61.22 | 43.77,54.85 43.84,54.98 43.84,56.37 60.11,72.64 73.68,72.64 85.04,61.29 85.18,61.22 | 80.95,29.15 81.02,29.29 81.02,45.36 83.45,47.78 83.52,47.92 | 156.21,18.7 155.67,18.7 133.72,40.65 C1_BAT2.1 133.58,40.72 130.88,40.72 129.91,39.75 C3.+ 129.77,39.68 126.31,43.14 IC4.5 126.17,43.21 124.58,43.21 124.03,43.77 122.09,43.77 120.29,41.97 116.83,41.97 73.06,85.73 73.06,98.89 TP16.TP 72.99,99.03 67.38,104.64 67.38,106.44 | 156.21,18.7 165.23,18.7 J3.2 | R8.2 51.38,27.21 51.18,27.01 49.17,27.01 R7.2 48.96,27.01 48.75,27.21 45.84,27.21 R6.2 45.7,27.35 45.7,28.46 37.95,36.22 37.95,45.22 37.33,45.84 R5.2 37.19,45.91 27.42,45.91 22.99,41.48 19.39,41.48 R1.2 19.25,41.41 11.84,41.41 9.14,44.11 9.14,44.46 U2.2 9.07,44.6 9.07,59.14 7.06,61.15 7.06,87.53 7.34,87.81 7.34,89.47 6.44,90.37 J4.P4 5.75,90.51 6.37,90.51 7.13,91.27 7.13,99.17 C9.1 | 67.38,106.44 67.38,106.99 R_BOOT.1 | R10.2 4.02,100.62 5.89,100.62 7.2,99.31 C9.1
  Top 0.3: 46.22,100.79 47.99,99.03 48.2,99.03 IC1.2 | 46.22,100.79 39.75,107.27 28.05,107.27 R_CHANGE.1 27.91,107.2 27.42,106.71 16.07,106.71 8.66,99.31 7.41,99.31 C9.1 | 46.22,100.79 52.42,106.99 R_RESET.1 52.63,106.99 53.18,106.44 67.38,106.44
32KHZ  (via drill 0.3)
  Top 0.15: R2-PINH1.1 89.12,59.55 89.12,59.69 87.74,61.08 87.74,61.22 87.6,61.35 86.7,61.35 86.42,61.08 86.42,58.59 U3.1 86.36,58.52 86.36,58.17 84.28,56.09 v83.93,56.09 | v20.36,47.92 18.07,45.64 18.07,44.53 U2.9 | v29.5,57.06 43.35,57.06 v46.12,59.83
  Bottom 0.15: v29.5,57.06 v20.36,47.92 | v46.12,59.83 80.19,59.83 v83.93,56.09
DN  (via drill 0.3)
  Top 0.15: v165.37,53.46 164.47,53.46 J2.B7 163.59,53.51 163.2,53.9 163.2,54.4 163.31,54.51 J2.A7 | v154.91,53.46 152.63,51.18 D1.1
  Bottom 0.15: v154.91,53.46 v165.37,53.46
DP  (via drill 0.3)
  Top 0.15: 165.2,54.26 165.23,54.29 165.23,54.78 165.02,54.98 164.47,54.98 J2.B6 | 165.2,54.26 164.95,54.02 164.47,54.02 J2.A6 | v153.25,48.54 153.25,48.61 152.63,49.24 D1.3 | 165.2,54.26 v165.37,54.08
  Bottom 0.15: v153.25,48.54 161.08,48.54 165.85,53.32 165.85,53.6 v165.37,54.08
EPD_3V3
  Top 0.3: 93.69,34.28 91.89,32.48 91.89,31.37 86.42,25.9 85.39,25.9 84.69,26.59 C7.1 | 93.69,34.28 93.69,35.32 93.49,35.52 90.44,35.52 85.45,30.54 L1.2 | Q2.2 80.33,26.52 79.92,26.52 78.39,25 76.31,25 73.54,22.23 73.54,19.94 72.78,19.18 72.44,19.18 72.16,18.91 72.16,17.87 75.97,14.06 85.52,14.06 86.22,14.75 86.22,15.1 J1.16 86.28,15.3 86.7,15.3 J1.15 86.77,15.44 86.77,15.72 86.98,15.93 91.2,15.93 94.11,18.84 94.73,18.84 EPD_C5.1 94.94,18.84 97.64,18.84 | 97.64,18.84 114.19,18.84 128.18,4.85 131.37,4.85 TP17.TP | 97.64,18.84 98.7,19.9 97.16,31.58 94.53,34.21 93.83,34.21 93.69,34.28
EPD_3V3_C
  Top 0.3: Q2.1 80.33,28.39 80.33,27.95 79.87,27.49 78.39,27.49 77.84,26.94 77.42,26.94 R_CL1.1 77.28,27.01 48.34,55.95 | 48.34,55.95 60.59,68.21 60.59,71.26 TP13.TP | 48.34,55.95 44.87,52.49 43.97,52.49 43.56,52.08 43.56,51.24 42.24,49.93 32.2,49.93 20.57,61.56 20.57,61.91 U2.18
EPD_BUSY  (via drill 0.3)
  Top 0.15: v89.75,14.13 89.75,15.23 J1.9 | TP9.TP 116.06,4.92 110.11,10.87 v93,10.87 92.93,10.87 92.45,10.39 62.67,10.39 61.29,11.77 v49.17,11.77 | v14.13,47.85 15.44,49.17 15.44,56.02 10.39,61.08 10.39,61.91 U2.26
  Bottom 0.15: v93,10.87 v89.75,14.13 | v14.13,47.85 14.34,47.85 16.14,46.05 18.77,46.05 49.17,15.65 v49.17,11.77
EPD_CS  (via drill 0.3)
  Top 0.15: v87.12,13.37 87.81,13.37 88.22,13.78 88.22,15.23 J1.12 | v76.17,14.61 76.17,15.03 72.85,18.35 R9.1 | v60.59,12.26 43.56,12.26 41.34,10.04 36.91,10.04 TP10.TP 36.91,10.11 v36.91,27.21 | v7.69,96.95 10.53,99.79 D6.1 | v18.63,45.57 19.74,45.57 20.5,44.8 20.5,44.53 U2.11
  Bottom 0.15: v87.12,13.37 77.42,13.37 v76.17,14.61 76.11,14.61 75.9,14.82 63.16,14.82 v60.59,12.26 | v7.69,96.95 5.33,96.95 3.12,94.73 3.12,66.34 7.41,62.05 7.41,45.91 7.76,45.57 v18.63,45.57 18.63,45.5 v36.91,27.21
EPD_DC  (via drill 0.3)
  Top 0.15: v88.36,13.3 88.71,13.64 88.71,15.23 J1.11 | v50.14,11.29 44.39,11.29 43,9.9 TP11.TP | v15.17,41.97 12.95,44.18 12.95,44.46 U2.5
  Bottom 0.15: v88.36,13.3 88.09,13.3 86.08,11.29 v50.14,11.29 50.14,10.46 49.79,10.11 49.51,10.11 17.66,41.97 v15.17,41.97
EPD_RST  (via drill 0.3)
  Top 0.15: v89.26,14.47 89.26,15.23 J1.10 | v83.52,23.13 v87.19,23.13 | v45.64,61.7 55.19,71.26 TP12.TP | v17.59,63.09 16.76,62.26 16.76,61.98 U2.21
  Bottom 0.15: v89.26,14.47 89.47,14.47 89.61,14.61 91.48,14.61 92.31,13.78 93.42,13.78 93.76,14.13 93.76,16.55 v87.19,23.13 | v83.52,23.13 82.61,23.13 79.15,26.59 68.42,26.59 45.64,49.38 v45.64,61.7 45.57,61.7 44.18,63.09 v17.59,63.09
FLASH_CS  (via drill 0.3)
  Top 0.15: v36.49,45.29 36.56,45.29 37.19,44.67 R5.1 | v36.49,53.6 36.49,54.22 U1.1 | v76.31,24.24 77.63,24.24 D9.1 | v39.61,47.71 v45.57,41.76 | v22.71,45.64 21.88,44.8 21.88,44.53 U2.12
  Bottom 0.15: 38.85,47.71 38.85,51.24 v36.49,53.6 | 38.85,47.71 38.85,47.02 37.12,45.29 v36.49,45.29 36.42,45.29 36.08,45.64 v22.71,45.64 | v76.31,24.24 63.09,24.24 v45.57,41.76 | 38.85,47.71 v39.61,47.71
GDR
  Top 0.15: 66.79,11.53 66.76,11.56 66.76,12.67 67.38,13.3 R4.2 | 66.79,11.53 66.89,11.43 68.35,11.43 69.73,12.81 70.29,12.81 70.98,12.12 81.51,12.12 81.85,12.46 90.86,12.46 93.21,14.82 93.21,15.23 J1.2 | 66.79,11.53 66.2,10.94 63.29,10.94 62.81,11.43 62.81,14.54 66.97,18.7 69.39,18.7 Q3.1
GND  (via drill 0.3, 0.35)
  Top 0.15: 15.44,97.44 14.23,98.65 | 14.23,98.65 13.09,99.79 12.12,99.79 D6.2 12.05,99.86 v11.01,100.9 | 15.44,97.44 15.44,91.89 16.27,91.06 J4.G2 16.34,91 17.11,90.23 17.11,87.19 16.34,86.42 16.34,85.39 J4.G1 | 54.5,96.74 54.5,86.63 TP5.TP | 54.5,96.74 52.91,98.33 C_DELAY.2 52.84,98.4 52.7,98.54 50.48,98.54 50,98.06 48.27,98.06 IC1.3 48.2,97.99 47.64,97.44 15.44,97.44 | TP4.TP 67.8,98.54 56.37,98.54 54.57,96.74 54.5,96.74 | BOOT_BUTTON.2 65.72,107.68 62.33,107.68 BOOT_BUTTON.1 62.19,107.68 61.63,107.13 60.52,107.13 C6.2 60.45,107.13 53.53,107.13 52.98,107.68 50.76,107.68 RESET_BUTTON.2 50.69,107.68 47.3,107.68 RESET_BUTTON.1 47.23,107.68 46.67,107.13 45.29,107.13 C5.2 45.22,107.13 40.44,107.13 39.68,107.89 26.18,107.89 26.04,107.75 CHANGE_BUTTON.2 25.97,107.68 22.58,107.68 CHANGE_BUTTON.1 22.44,107.68 22.16,107.41 20.71,107.41 C10.2 20.64,107.34 13.99,107.34 9.24,102.59 | 4.71,92.66 5.68,92.66 J4.P6 | 4.71,92.66 3.12,94.25 3.12,95.5 J4.G4 3.05,95.56 3.05,100.83 3.46,101.24 5.82,101.24 6.44,100.62 7.2,100.62 C9.2 7.27,100.62 9.24,102.59 | J4.G3 2.08,82.41 2.08,89.96 4.71,92.59 4.71,92.66 | v9.35,102.56 9.28,102.56 9.24,102.59 | U2.29_1 12.33,50.48 12.33,51.66 U2.29_2 12.4,51.66 13.5,51.66 U2.29_5 13.64,51.73 14.2,51.73 | U2.29_1 12.4,50.48 13.5,50.48 U2.29_4 13.64,50.48 14.75,50.48 U2.29_7 | 14.2,51.73 14.75,51.73 U2.29_8 | v7.89,46.05 7.89,44.53 U2.1 | v11.63,49.79 12.26,50.41 U2.29_1 | 14.2,52.98 13.64,52.98 U2.29_6 13.5,52.98 U2.29_3 12.33,53.05 12.33,56.44 7.89,60.87 7.89,61.91 U2.28 7.83,62.05 7.83,92.24 14.23,98.65 | 14.2,52.98 14.75,52.98 U2.29_9
  Top 0.15: 14.2,52.98 14.2,51.73 | U1.4 36.56,50.48 v38.36,50.48 38.5,50.48 40.37,52.35 U1.9 | 50.55,31.09 51.38,31.09 D12.2 | 50.55,31.09 49.17,31.09 D11.2 49.03,31.02 48.82,31.23 45.84,31.23 D10.2 45.77,31.3 38.71,38.36 38.71,45.15 39.33,45.77 39.33,45.98 D8.2 39.4,46.12 v38.36,47.16 | EPD_C10.2 86.15,20.08 v86.91,20.08 87.88,20.08 EPD_C9.2 87.95,20.08 89.33,20.08 EPD_C8.2 89.4,20.08 91.06,20.08 EPD_C7.2 91.13,20.15 92.86,20.15 EPD_C6.2 92.93,20.15 94.73,20.15 EPD_C5.2 | 75,21.81 76.73,21.81 79.08,24.17 D9.2 79.4,23.95 79.4,23.5 79.1,23.2 78.9,23.2 v78.5,22.8 | 75,21.81 74.31,21.81 EPD_C2.2 | SJ1.1 63.99,12.05 63.99,14.2 R2.1 64.06,14.27 v65.37,15.58 | C10_SUPERCAP.1 91.27,48.89 91.2,48.82 88.92,48.82 C8.2 88.85,48.75 v87.74,48.75 | EPD_C12.2 82.82,20.15 84.07,20.15 84.14,20.22 EPD_C11.2 84.21,20.29 v84.97,21.05 | 86.63,12.81 89.06,12.81 90.23,13.99 90.23,15.23 J1.8 | 86.63,12.81 81.3,12.81 J1.MP2 81.23,12.81 80.95,13.09 69.6,13.09 68.56,12.05 67.45,12.05 R4.1 | v86.08,16.07 85.8,15.79 85.8,15.3 J1.17 | 86.63,12.81 v86.63,14.4 | v93.28,14.27 94.73,12.81 J1.MP1 | v86.7,26.94 86.42,26.66 86.01,26.66 C7.2 | v83.72,36.01 83.72,37.74 D3.1 | v82.61,47.71 82.61,49.24 U3.13 | v75,21.05 75,21.81 | U4.9 138.01,52.98 138.01,52.84 137.46,52.28 137.12,52.28 U4.4 137.05,52.22 137.05,50.9 134.76,48.61 131.44,48.61 129.67,50.38 | U4.6 139.05,52.77 138.01,52.77 U4.9 | U4.1 137.12,53.74 137.46,53.74 138.01,53.18 138.01,53.05 U4.9 | 126.48,53.08 127.42,52.15 127.63,52.15 MCP73831.2 127.7,52.08 127.97,52.08 129.67,50.38 | 126.48,53.08 125.69,53.88 115.16,53.88 114.47,53.18 114.47,52.15 114.61,52.01 115.58,52.01 116.2,52.63 116.34,52.63 C1_BAT.2
  Top 0.15: 126.48,53.08 129.01,55.61 C2_BAT.2 | IC4.2 123.54,42.24 124.17,41.62 124.17,40.86 122.23,38.92 121.53,38.92 C1_BAT1.2 121.47,38.92 v120.63,39.75 | v119.11,41.27 117.93,41.27 R1_PWRUSB.2 | 125.86,46.5 129.71,42.66 C3.- 129.77,42.59 130.33,42.03 133.58,42.03 C1_BAT2.2 133.65,42.03 141.06,49.44 149.79,49.44 | 125.86,46.5 124.93,47.44 R2_BAT.1 | 149.79,49.44 150.41,49.44 R2-USB.2 | v125.83,46.4 125.83,46.47 125.86,46.5 | v129.64,50.28 129.64,50.34 129.67,50.38 | C4_USB.2 155.19,47.37 C5_USB.2 155.19,47.44 155.19,48.13 155.95,48.89 155.95,49.65 155.4,50.21 155.12,50.21 D1.5 155.05,50.28 154.77,50.28 154.22,50.83 154.22,51.52 154.43,51.73 155.74,51.73 155.95,51.52 156.64,51.52 | J2.A12 164.4,57.55 164.4,57.34 J2.B1 164.33,57.34 163.5,57.34 157.68,51.52 157.41,51.52 R2-USB1.1 157.34,51.52 156.64,51.52 | SENSOR2.5 153.8,10.53 153.8,10.25 153.32,9.76 152.77,9.76 152.28,10.25 152.28,10.53 SENSOR2.7 152.42,10.04 v152,9.63 | C1.2 154.08,7.13 153.04,7.13 C2.2 153.04,7.06 152.49,6.51 150.41,6.51 150.27,6.65 150.27,9.63 | 150.27,9.63 150.27,10.39 151.38,11.49 151.38,13.43 SENSOR2.1 | 150.27,9.63 v150.9,9.63 | J2.B12 164.4,51.18 164.4,50.97 J2.A1 164.47,50.9 164.47,49.65 164.95,49.17 J2.MP3 165.02,49.1 166.13,47.99 | 166.13,47.99 166.13,39.82 | 166.13,39.82 166.13,18.28 165.58,17.73 165.3,17.73 J3.1 165.23,17.66 v157.2,9.63 | 166.13,47.99 166.2,47.99 167.31,49.1 168.9,49.1 J2.MP1 168.9,49.17 168.9,59.35 J2.MP2 168.9,59.42 165.02,59.42 J2.MP4 164.95,59.35 162.81,59.35 156.64,53.18 156.64,51.52 | 149.79,49.44 149.79,39.96 149.93,39.82 150.48,39.82 151.3,39 165,38.9 165.92,39.82 166.13,39.82
  Top 0.15: v50.55,30.89 50.55,31.09 | EPD_C1.2 79,28.9 v79.3,29.2 | v82.1,24.7 82.1,23.9 81,22.8 v80.5,22.8
  Bottom 0.15: v9.35,102.56 v11.01,100.9 | v7.89,46.05 v11.63,49.79 12.81,49.79 15.17,47.44 38.36,47.44 | v38.36,47.16 38.36,47.44 | 38.36,47.44 v38.36,50.48 | 86.08,15.58 86.08,14.96 v86.63,14.4 | 86.08,15.58 v86.08,16.07 88.36,16.07 89.26,16.97 | v93.28,14.27 93.07,14.27 90.37,16.97 89.26,16.97 | 86.7,20.08 86.7,19.6 89.26,17.04 89.26,16.97 | 86.7,20.08 86.7,21.05 | 86.7,21.05 v86.7,26.94 86.7,27.01 83.72,29.98 v83.72,36.01 83.72,36.08 82.61,37.19 82.61,46.6 | 86.7,21.05 v84.97,21.05 | 82.61,46.6 v82.61,47.71 | 82.61,46.6 85.59,46.6 v87.74,48.75 111.56,48.75 119.04,41.27 v119.11,41.27 119.91,40.48 | 86.08,15.58 74.51,15.58 | 74.51,15.58 v65.37,15.58 65.37,15.65 50.55,30.47 v50.55,30.89 | v75,21.05 75,20.36 74.51,19.88 74.51,15.58 | 86.7,20.08 v86.91,20.08 | v120.63,39.75 119.91,40.48 | 119.91,40.48 v125.83,46.4 125.83,46.47 v129.64,50.28 | v150.9,9.63 v152,9.63 v157.2,9.63 | v79.3,29.2 80.4,29.2 81.1,28.5 81.1,25.7 v82.1,24.7 | v80.5,22.8 v78.5,22.8
GPIO8  (via drill 0.3)
  Top 0.15: v19.94,40.72 19.32,40.1 R1.1 | v19.94,43.35 19.94,43.56 19.32,44.18 19.32,44.46 U2.10
  Bottom 0.15: v19.94,43.35 v19.94,40.72
I2C_PW
  Top 0.3: C2.1 153.04,5.82 154.08,5.82 C1.1 154.22,5.89 154.91,6.58 154.91,7.55 154.7,7.76 152.49,7.76 152,7.27 R1_PINH.2 151.94,7.13 151.45,7.13 | 151.45,7.13 150.97,7.13 R2_PINH.2 | 152.28,11.36 152.56,11.36 152.97,10.94 152.97,10.6 SENSOR2.6 | 152.28,11.36 151.94,11.36 151.45,10.87 151.45,10.6 SENSOR2.8 151.45,10.46 151.45,7.13 | 152.28,11.36 152.28,13.43 SENSOR2.2 152.14,13.57 152.14,13.92 151.8,14.27 143.62,14.27 84.76,73.13 32.62,73.13 21.88,62.39 21.88,61.98 U2.17
INT_RTC  (via drill 0.3)
  Top 0.15: v85.11,47.37 85.66,46.81 85.87,46.81 R1_PINH1.1 | v83.45,57.2 83.45,58.1 83.86,58.52 U3.3 | v19.32,47.92 16.76,45.36 16.76,44.53 U2.8 | v47.09,60.8 v25.76,60.8 | v82.96,76.59 77.84,81.72 77.84,98.82 TP15.TP
  Bottom 0.15: v85.11,47.37 85.11,55.54 v83.45,57.2 83.45,57.27 83.17,57.55 83.17,58.93 81.3,60.8 | v19.32,47.92 19.32,54.36 v25.76,60.8 | 81.3,60.8 v47.09,60.8 | v82.96,76.59 82.96,62.53 81.3,60.87 81.3,60.8
IO/BOOT  (via drill 0.3)
  Top 0.15: R_BOOT.2 67.31,108.38 66.62,108.38 65.79,109.21 BOOT_BUTTON.3 65.72,109.21 62.33,109.21 BOOT_BUTTON.4 62.19,109.14 61.49,108.44 60.52,108.44 C6.1 60.45,108.38 v59.83,107.75 | v32.89,72.57 24.38,64.06 24.38,61.98 U2.15
  Bottom 0.15: v32.89,72.57 32.89,80.81 v59.83,107.75
IO/CHANGE  (via drill 0.3)
  Top 0.15: R_CHANGE.2 27.98,108.65 26.52,108.65 26.04,109.14 CHANGE_BUTTON.3 25.97,109.21 CHANGE_BUTTON.4 22.44,109.14 22.02,108.72 20.71,108.72 C10.1 20.64,108.65 v19.8,107.82 | v14.27,97.99 14.27,61.98 U2.23
  Bottom 0.15: v14.27,97.99 14.27,102.28 v19.8,107.82
MISO  (via drill 0.3)
  Top 0.15: D12.1 51.45,29.64 52.08,29.02 52.08,26.8 51.45,26.18 51.45,25.97 R8.1 51.38,25.9 51.04,25.55 v50.55,25.55 | v49.65,10.6 48.48,9.42 TP6.TP | v22.09,60.8 29.85,53.05 36.49,53.05 U1.2 36.56,53.05 36.98,53.46 v37.26,53.46 | v10.04,60.8 9.14,61.7 9.14,61.91 U2.27 | v4.99,95.56 4.92,95.5 4.92,94.39 5.54,93.76 J4.P7
  Bottom 0.15: v49.65,10.6 49.65,24.65 50.24,25.24 | v50.55,25.55 50.24,25.24 | v22.09,60.8 v10.04,60.8 10.04,60.87 3.67,67.24 3.67,92.86 4.99,94.18 v4.99,95.56 | 50.24,25.24 40.1,35.39 40.1,50.62 v37.26,53.46
MOSI  (via drill 0.3)
  Top 0.15: v87.67,13.85 87.25,14.27 87.25,15.23 J1.14 | v120.77,10.39 126.24,4.92 TP7.TP | v49.79,26.32 49.17,25.69 R7.1 | v49.79,28.74 49.79,28.88 49.17,29.5 D11.1 | v45.08,50 44.67,50.41 44.39,50.41 U1.5 | v30.47,48.2 30.26,48.41 19.18,48.41 15.51,44.74 15.51,44.53 U2.7 | v4.64,71.61 4.64,88.78 5.19,89.33 5.89,89.33 J4.P3
  Bottom 0.15: v120.77,10.39 92.24,10.39 88.78,13.85 v87.67,13.85 87.67,13.3 85.94,11.56 60.66,11.56 51.04,21.19 51.04,25.69 50.41,26.32 v49.79,26.32 v49.79,28.74 49.79,28.81 45.08,33.52 v45.08,50 45.01,50 40.93,54.08 36.36,54.08 34.73,52.46 | 34.73,52.46 v30.47,48.2 | v4.64,71.61 14.68,61.56 25.62,61.56 34.73,52.46
N$1
  Top 0.15: R2-USB1.2 157.41,52.84 158.58,52.84 163.71,57.96 165.58,57.96 166.13,57.41 166.13,53.6 165.51,52.98 164.47,52.98 J2.A5
N$2  (via drill 0.3)
  Top 0.15: v150.13,51.52 150.41,51.24 150.41,50.76 R2-USB.1 | v165.37,55.61 165.02,55.95 164.47,55.95 J2.B5
  Bottom 0.15: v150.13,51.52 152.35,51.52 156.44,55.61 v165.37,55.61
N$3  (via drill 0.3)
  Top 0.15: C1_BAT1.1 120.22,38.92 120.22,39.54 120.15,39.61 120.15,40.93 D2.1 120.22,40.93 121.81,40.93 122.71,41.83 122.78,41.83 | 122.78,41.83 123.33,41.27 123.47,41.27 IC4.3 | 122.78,41.83 122.78,42.59 123.33,43.14 IC4.1 123.54,43.14 123.96,42.73 v124.3,42.73 | v131.23,43.21 135.18,47.16 Q1.2
  Bottom 0.15: v131.23,43.21 124.79,43.21 v124.3,42.73
N$4
  Top 0.15: CHG_LED.C 119.25,52.7 119.25,50.9 R1_BAT.1
N$5  (via drill 0.3)
  Top 0.15: v124.1,50.9 120.56,50.9 R1_BAT.2 | v126.73,51.59 127.21,51.59 127.63,51.18 MCP73831.1
  Bottom 0.15: v124.1,50.9 126.03,50.9 v126.73,51.59
N$6  (via drill 0.3)
  Top 0.15: 96.78,35.63 94.67,37.74 87.25,37.74 D3.2 | 96.78,35.63 97.3,35.11 98.33,35.11 C4.1 | v94.8,33.1 92.8,31.09 D4.1 | v96.74,35.59 96.78,35.63
  Bottom 0.15: v94.8,33.1 94.8,33.66 v96.74,35.59
N$7
  Top 0.15: R2_BAT.2 124.93,48.82 124.93,50.97 125.07,51.11 MCP73831.5
N$8
  Top 0.15: IC1.5 51.11,99.93 52.56,99.93 52.84,99.65 C_DELAY.1
N$9  (via drill 0.3)
  Top 0.15: v84.76,62.33 85.52,62.33 D7.1 | v85.73,59.83 85.73,60.52 85.87,60.66 R_CAPACITOR.1
  Bottom 0.15: v84.76,62.33 84.76,60.8 v85.73,59.83
N$10
  Top 0.15: J1.24 82.27,15.3 82.27,18.35 82.75,18.84 EPD_C12.1
N$11
  Top 0.15: J1.18 85.32,15.3 85.32,15.93 86.49,17.11 88.16,17.11 88.64,17.59 91.62,17.59 92.86,18.84 EPD_C6.1
N$12
  Top 0.15: J1.19 84.76,15.3 84.76,15.79 86.36,17.38 88.02,17.38 88.5,17.87 90.09,17.87 91.06,18.84 EPD_C7.1
N$13
  Top 0.15: J1.20 84.28,15.3 84.28,15.72 86.22,17.66 87.88,17.66 88.36,18.14 88.78,18.14 89.33,18.7 EPD_C8.1
N$14
  Top 0.15: J1.22 83.31,15.3 83.31,15.93 86.08,18.7 EPD_C10.1
N$18  (via drill 0.3)
  Top 0.15: v92.1,16.07 91.76,15.72 91.76,15.3 J1.5 | v85.32,19.32 v88.64,19.32 | v75,19.74 74.31,20.43 EPD_C2.1
  Bottom 0.15: v92.1,16.07 91.89,16.07 v88.64,19.32 | v85.32,19.32 75.41,19.32 v75,19.74
N$19  (via drill 0.3)
  Top 0.15: v92.24,14.47 92.24,15.23 J1.4 | v90.23,16.48 88.85,16.48 v88.5,16.83 | v78.74,26.11 78.74,26.59 78.94,26.8 EPD_C1.1
  Bottom 0.15: v90.23,16.48 v92.24,14.47 | v88.5,16.83 79.22,26.11 v78.74,26.11
PREVGH
  Top 0.3: EPD_C9.1 87.88,18.7 87.25,18.07 86.08,18.07 83.79,15.79 83.79,15.3 J1.21 83.72,15.1 83.72,14.75 83.52,14.54 81.99,14.54 81.78,14.75 81.78,20.36 82.96,21.54 82.96,26.18 84.21,27.42 85.87,27.42 92.8,34.35 92.8,34.76 D5.1
PREVGL
  Top 0.3: J1.23 82.75,15.3 82.75,17.52 84.14,18.91 EPD_C11.1 84.28,19.04 84.97,19.74 84.97,20.15 95.84,31.02 96.26,31.02 D4.2
RESE  (via drill 0.3)
  Top 0.15: v70.01,12.05 70.5,11.56 81.78,11.56 81.92,11.7 94.6,11.7 95.22,12.33 95.22,14.68 94.04,15.86 93,15.86 92.8,15.65 92.8,15.3 J1.3 | v63.29,14.34 63.29,14.61 66.69,18 70.01,18 70.7,18.7 Q3.2 70.77,18.77 70.77,19.53 72.78,21.54 R3.2
  Bottom 0.15: v70.01,12.05 65.58,12.05 v63.29,14.34
RESE'
  Top 0.15: SJ1.2 65.44,12.05 65.3,12.19 65.3,14.2 R2.2 65.37,14.2 67.31,14.2 71.26,18.14 71.26,18.56 72.78,20.08 72.78,20.43 R3.1
RESET  (via drill 0.3)
  Top 0.15: R_RESET.2 52.42,108.38 51.59,108.38 50.76,109.21 RESET_BUTTON.3 50.69,109.14 49.03,109.14 48.34,108.44 v48.27,108.44 47.99,108.44 47.3,109.14 RESET_BUTTON.4 47.23,109.21 46.4,108.38 45.29,108.38 C5.1 | v48.27,102.08 48.27,100 IC1.1 | v13.57,49.65 10.39,46.47 10.39,44.53 U2.3 | v24.72,60.8 32.41,68.49 v32.41,71.47
  Bottom 0.15: v48.27,108.44 v48.27,102.08 48.27,102 32.41,86.15 v32.41,71.47 | v24.72,60.8 v13.57,49.65
RTC_RST  (via drill 0.3)
  Top 0.15: v46.6,60.32 24.52,60.32 23.13,61.7 23.13,61.91 U2.16 | v81.16,60.32 82.55,58.93 82.55,58.59 U3.4
  Bottom 0.15: v81.16,60.32 v46.6,60.32
RX  (via drill 0.3)
  Top 0.15: v13.78,63.09 12.95,62.26 12.95,61.98 U2.24 | v63.57,85.59 64.54,86.56 TP2.TP
  Bottom 0.15: v13.78,63.09 16.97,63.09 24.86,70.98 48.96,70.98 v63.57,85.59
SCK  (via drill 0.3)
  Top 0.15: v87.74,14.47 87.74,15.23 J1.13 | v92.03,11.22 92.73,11.22 92.86,11.36 114.75,11.36 121.19,4.92 TP8.TP | 52.35,25.76 51.66,25.07 48.54,25.07 47.71,25.9 45.84,25.9 R6.1 | 52.35,25.76 52.35,29.98 52.04,30.3 | 52.04,30.3 51.94,30.4 49.72,30.4 49.58,30.26 46.33,30.26 45.84,29.78 D10.1 | 46.78,49.48 52.08,44.18 52.08,30.33 52.04,30.3 | 46.78,49.48 44.6,51.66 44.39,51.66 U1.6 | v17.66,48.2 14.27,44.8 14.27,44.53 U2.6 | v18.63,49.17 45.84,49.17 45.98,49.03 46.33,49.03 46.78,49.48 | v4.16,90.37 5.33,91.55 J4.P5 | v52.42,25.76 52.35,25.76
  Bottom 0.15: v92.03,11.22 91.89,11.22 88.64,14.47 v87.74,14.47 87.32,14.47 86.77,13.92 77.49,13.92 76.31,15.1 63.09,15.1 v52.42,25.76 | v17.66,48.2 v18.63,49.17 18.63,54.08 25.21,60.66 25.21,60.94 24.86,61.29 14.34,61.29 4.16,71.47 v4.16,90.37
SCL  (via drill 0.3)
  Top 0.15: v150.06,6.23 150.41,5.89 150.9,5.89 R2_PINH.1 | SENSOR2.4 153.8,13.43 153.8,13.16 153.36,12.71 v153.36,12.35 | v140.3,52.35 139.4,53.25 139.12,53.25 U4.7 | 163.33,22.61 165.23,20.71 J3.4 | 163.33,22.61 v140.3,45.64 | 163.33,22.61 v160.45,19.74 | v46.12,49.51 30.19,49.51 18.07,61.63 18.07,61.91 U2.20 | v87.12,48.75 86.91,48.75 86.42,49.24 U3.16
  Bottom 0.15: v150.06,6.23 150.06,9.42 153.18,12.53 | v140.3,45.64 140.3,50.8 | 140.3,50.8 v140.3,52.35 | v160.45,19.74 153.25,12.53 153.18,12.53 | v46.12,49.51 82.34,49.51 84.97,46.88 85.25,46.88 v87.12,48.75 87.12,48.82 87.53,49.24 124.79,49.24 126.31,50.76 139.9,51.2 140.3,50.8 | v153.36,12.35 153.18,12.53
SDA  (via drill 0.3, 0.35)
  Top 0.15: v140.3,53.74 139.12,53.74 U4.8 | v152.49,14.34 152.97,13.85 152.97,13.5 SENSOR2.3 | v161.08,19.74 165.23,19.74 J3.3 | v83.45,73.68 30.75,73.68 19.32,62.26 19.32,61.98 U2.19 | v85.59,50.62 85.59,49.72 85.18,49.31 U3.15 | v152.7,4.2 151.96,4.94 R1_PINH.1
  Top 0.152: SENSOR2.3 153.04,12.84 152.7,12.5 152.7,12.3 v153.25,11.75 | v153.25,11.75
  Bottom 0.15: v152.49,14.34 152.49,20.22 | 152.49,20.22 152.49,41.55 v140.3,53.74 86,53.2 85.59,53.61 | v161.08,19.74 160.59,20.22 152.49,20.22 | v83.45,73.68 83.45,57.82 85.59,55.68 85.59,53.74 85.59,53.61 | v85.59,50.62 85.59,53.61 | 154.8,3.8 153.1,3.8 v152.7,4.2
  Bottom 0.152: 154.8,3.8 155.5,3.8 156.7,5 156.7,7 158.2,8.5 158.2,9.9 157.5,10.6 155.7,10.6 154.55,11.75 v153.25,11.75
SRC  (via drill 0.3)
  Top 0.15: C4.2 98.4,36.29 98.4,36.15 99.03,35.52 99.03,34.62 98.89,34.49 96.6,34.49 96.33,34.76 D5.2 96.26,34.83 94.73,34.83 93.63,35.94 86.22,35.94 85.45,35.18 L1.1 85.39,35.11 84.31,34.03 v82.24,34.03 | v76.38,27.08 70.15,20.84 Q3.3
  Bottom 0.15: v82.24,34.03 76.38,28.18 v76.38,27.08
SS_SD  (via drill 0.3)
  Top 0.15: v4.71,93.28 4.5,93.49 4.5,96.05 4.02,96.53 4.02,99.31 R10.1 | v5.12,88.64 5.89,88.64 6.23,88.29 J4.P2 | 15.93,48.68 15.65,48.68 11.7,44.74 11.7,44.53 U2.4 | 15.93,48.68 38.02,48.68 40.1,46.6 40.1,45.5 39.4,44.8 39.4,44.6 D8.1 | 15.93,48.68 v15.93,53.95
  Bottom 0.15: v5.12,88.64 4.71,89.06 v4.71,93.28 4.71,93.49 5.47,94.25 5.47,95.7 5.12,96.05 4.85,96.05 3.39,94.6 3.39,66.48 v15.93,53.95
TOP-GND
  pour Top: 97.06,10.04 97.08,10.02 97.08,0.08 170.12,0.08 170.12,67.12 92.18,67.12 92.16,67.14 92.14,67.16 92.12,67.18 92.12,111.12 69.48,111.12 69.48,109.98 69.46,109.96 69.44,109.94 69.42,109.92 18.68,109.92 18.66,109.94 18.64,109.96 18.62,109.98 18.62,111.12 0.08,111.12 0.08,62.48 6.52,62.48 6.54,62.46 6.56,62.44 6.58,62.42 6.58,44.08 6.56,44.06 6.54,44.04 6.52,44.02 0.08,44.02 0.08,0.08 78.72,0.08 78.72,10.02 78.74,10.04 78.76,10.06 78.78,10.08 97.02,10.08 97.04,10.06
  pour Bottom: 97.06,10.04 97.08,10.02 97.08,0.08 170.12,0.08 170.12,67.12 92.18,67.12 92.16,67.14 92.14,67.16 92.12,67.18 92.12,111.12 69.48,111.12 69.48,109.98 69.46,109.96 69.44,109.94 69.42,109.92 18.68,109.92 18.66,109.94 18.64,109.96 18.62,109.98 18.62,111.12 0.08,111.12 0.08,62.48 6.52,62.48 6.54,62.46 6.56,62.44 6.58,62.42 6.58,44.08 6.56,44.06 6.54,44.04 6.52,44.02 0.08,44.02 0.08,0.08 78.72,0.08 78.72,10.02 78.74,10.04 78.76,10.06 78.78,10.08 97.02,10.08 97.04,10.06
TX  (via drill 0.3)
  Top 0.15: v13.78,64.33 11.7,62.26 11.7,61.98 U2.25 | v31.92,74.17 47.09,74.17 59.55,86.63 TP1.TP
  Bottom 0.15: v13.78,64.33 17.8,64.33 27.63,74.17 v31.92,74.17
USB_D+  (via drill 0.3)
  Top 0.15: v153.6,50.34 154.63,49.31 155.05,49.31 D1.4 | v47.99,61.29 47.99,61.08 42.17,55.26 34.76,55.26 v33.03,53.53 | v27.42,47.92 27.42,47.58 24.38,44.53 U2.14
  Bottom 0.15: v153.6,50.34 144.32,50.34 127.83,66.83 92.03,66.83 83.45,75.41 83.45,76.73 83.1,77.08 63.78,77.08 v47.99,61.29 | v27.42,47.92 v33.03,53.53
USB_D-  (via drill 0.3)
  Top 0.15: v151.94,41.48 156.23,45.77 156.23,50.28 155.4,51.11 155.12,51.11 D1.6 | v93.69,12.19 81.99,12.19 81.65,11.84 70.84,11.84 70.15,12.53 69.87,12.53 68,10.66 62.81,10.66 48.68,24.79 v42.52,24.79 | v23.96,43.35 23.13,44.18 23.13,44.46 U2.13
  Bottom 0.15: v151.94,41.48 122.99,41.48 v93.69,12.19 | v23.96,43.35 v42.52,24.79
VBAT
  Top 0.3: 135.42,51.49 136.63,52.7 136.98,52.7 U4.3 137.12,52.77 137.12,53.25 U4.2 136.98,53.32 136.63,53.32 136.42,53.53 136.42,54.02 140.23,57.82 140.23,62.39 TP3.TP | 135.42,51.49 134.28,50.34 134.28,49.38 Q1.3 | 135.42,51.49 132.61,54.29 C2_BAT.1 132.41,54.29 131.23,53.12 127.7,53.12 MCP73831.3
VBUS
  Top 0.3: R1_PWRUSB.1 117.93,42.66 119.73,42.66 120.08,43 D2.2 120.01,43.14 120.01,50.14 119.87,50.28 119.87,51.87 120.63,52.63 CHG_LED.A | 124.79,52.77 120.77,52.77 CHG_LED.A | 124.79,52.77 125.07,53.05 MCP73831.4 | 124.79,52.77 130.33,47.23 133.31,47.23 Q1.1 133.44,47.3 134,47.3 138.5,51.8 142.66,51.8 146.53,55.68 146.67,55.75 | C1_BAT.1 115.09,52.7 115.23,52.7 115.99,53.46 120.01,53.46 120.63,52.84 CHG_LED.A | 146.67,55.75 146.67,62.26 TP14.TP | 146.67,55.75 152.14,50.28 152.49,50.28 D1.2 152.63,50.21 152.97,50.21 153.8,49.38 153.8,47.51 C5_USB.1 153.94,47.37 153.94,45.84 C4_USB.1 153.87,45.7 150.83,42.66 150.83,41.9 PFMF.050.1.2
VRTC
  Top 0.3: C10_SUPERCAP.2 91.27,51.11 90.3,50.14 88.92,50.14 C8.1 88.85,50.28 87.19,51.94 | 87.19,51.94 87.19,60.66 R_CAPACITOR.2 | U3.14 83.93,49.31 83.93,49.72 86.08,51.87 87.05,51.87 87.19,51.94
VUSB
  Top 0.3: J2.A4 164.4,51.73 164.4,52.01 J2.B9 164.26,52.08 163.71,52.08 | J2.A9 164.4,56.78 164.4,56.58 J2.B4 164.26,56.51 163.78,56.51 162.6,55.33 162.6,53.18 163.71,52.08 | 163.71,52.08 163.64,51.94 163.64,51.59 155.33,43.28 155.33,41.9 PFMF.050.1.1